# Altium PCB V.PcbDoc
Units mil, origin at the board's own origin, x right, y up, seen from the top; angles counter-clockwise.
Board outline 6000 x 4000 mil, 4 copper layers (Top Layer, Internal Plane 1, Internal Plane 2, Bottom Layer); 10 components, 11 nets, 83 pads, 42 vias.
Unrouted connection lines stored in the file: 8.
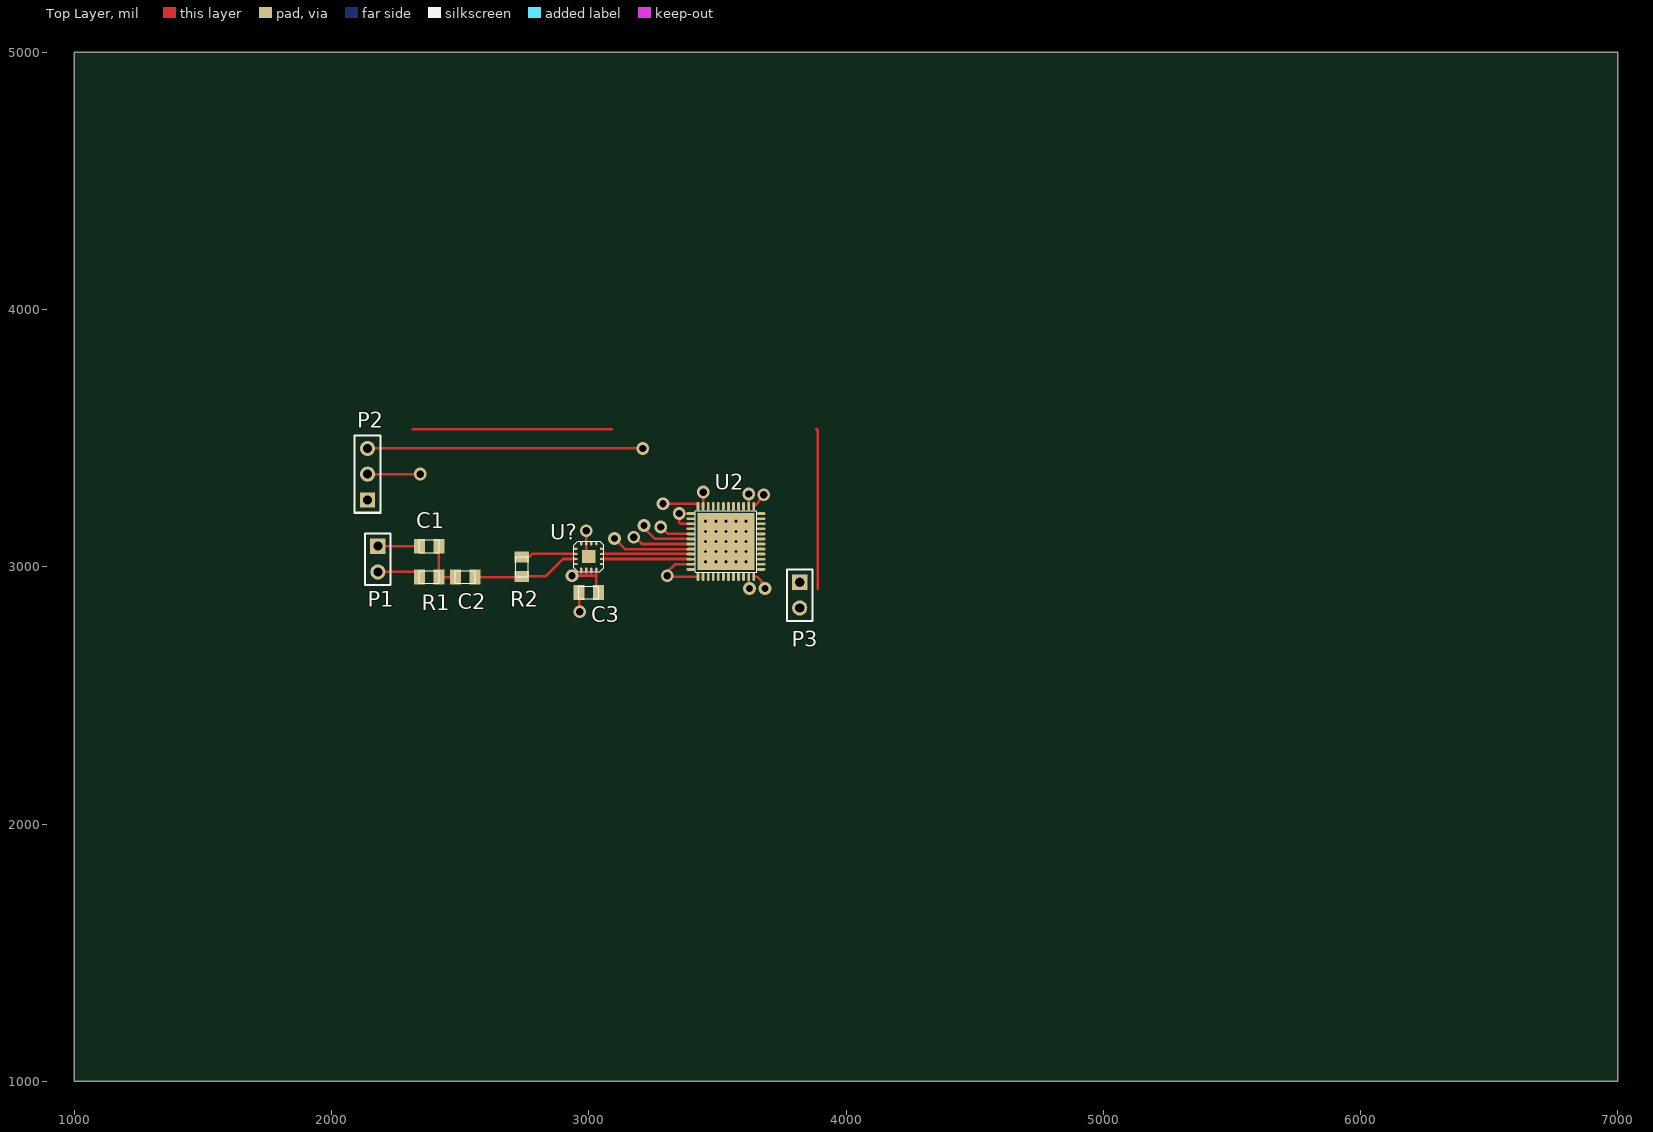
[diagram p0: Top Layer view]
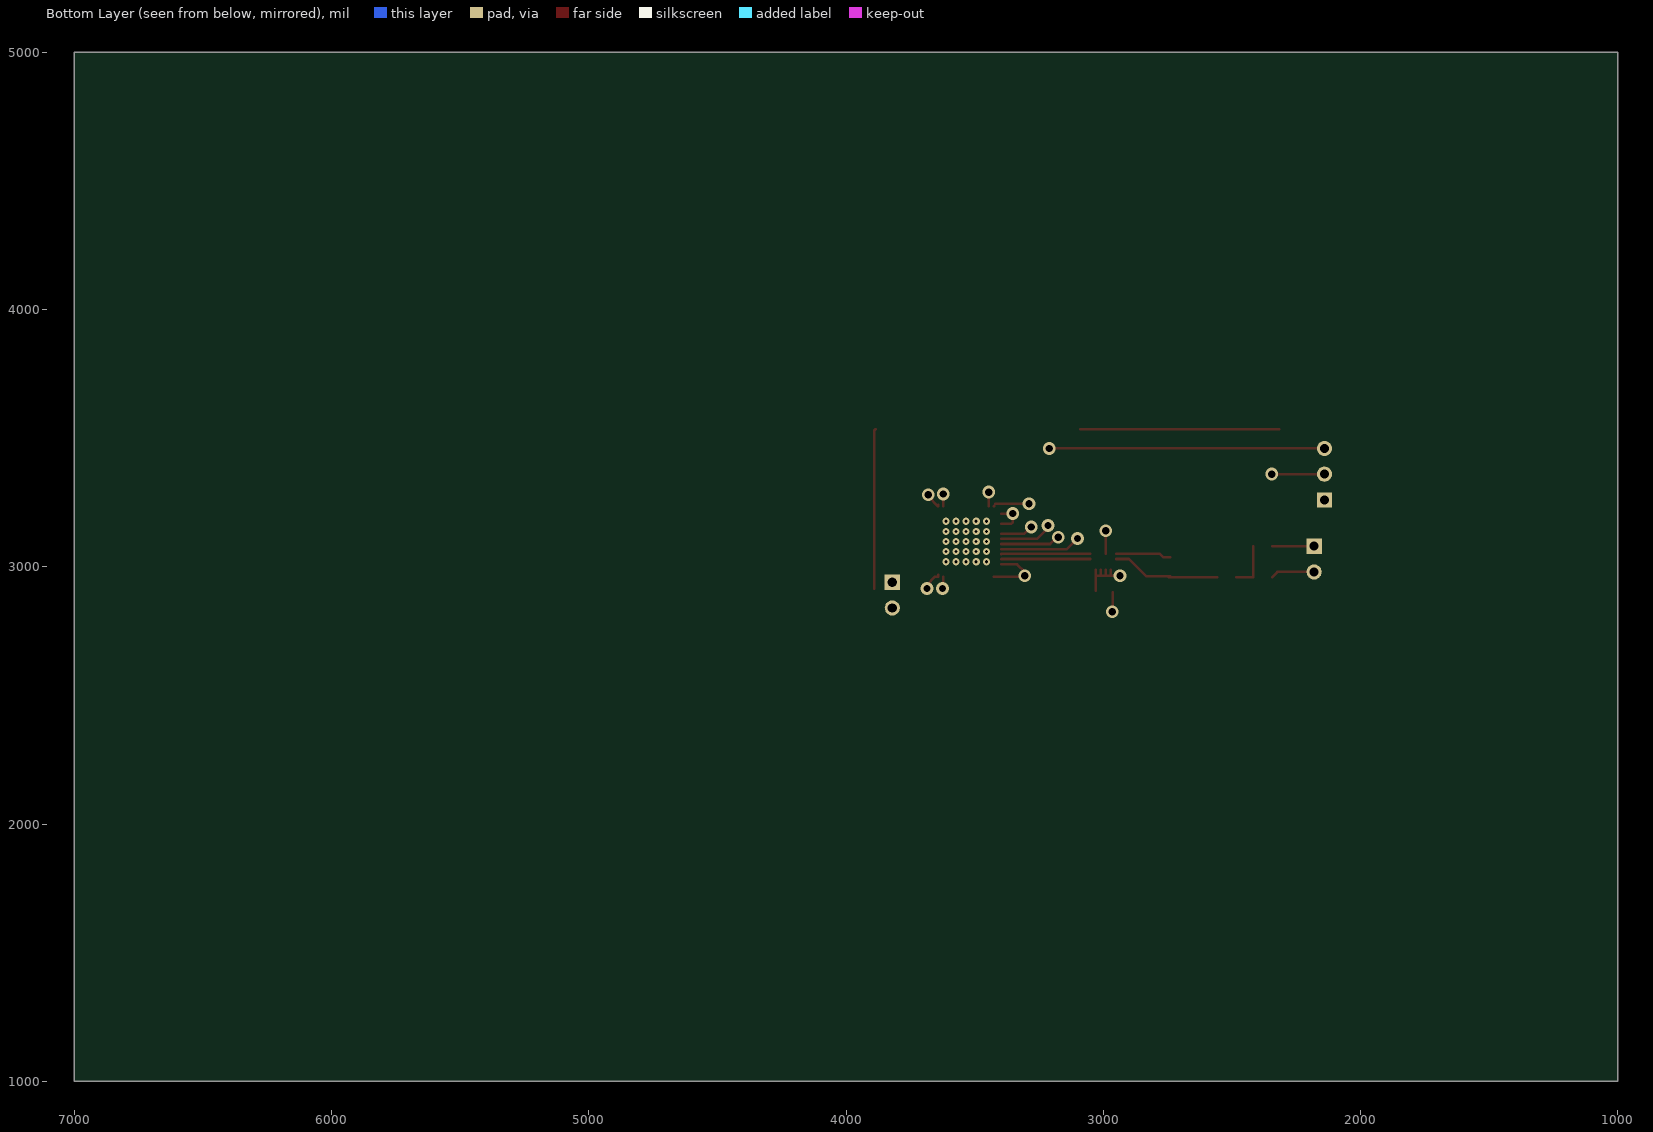
[diagram p1: Bottom Layer view, seen from below]
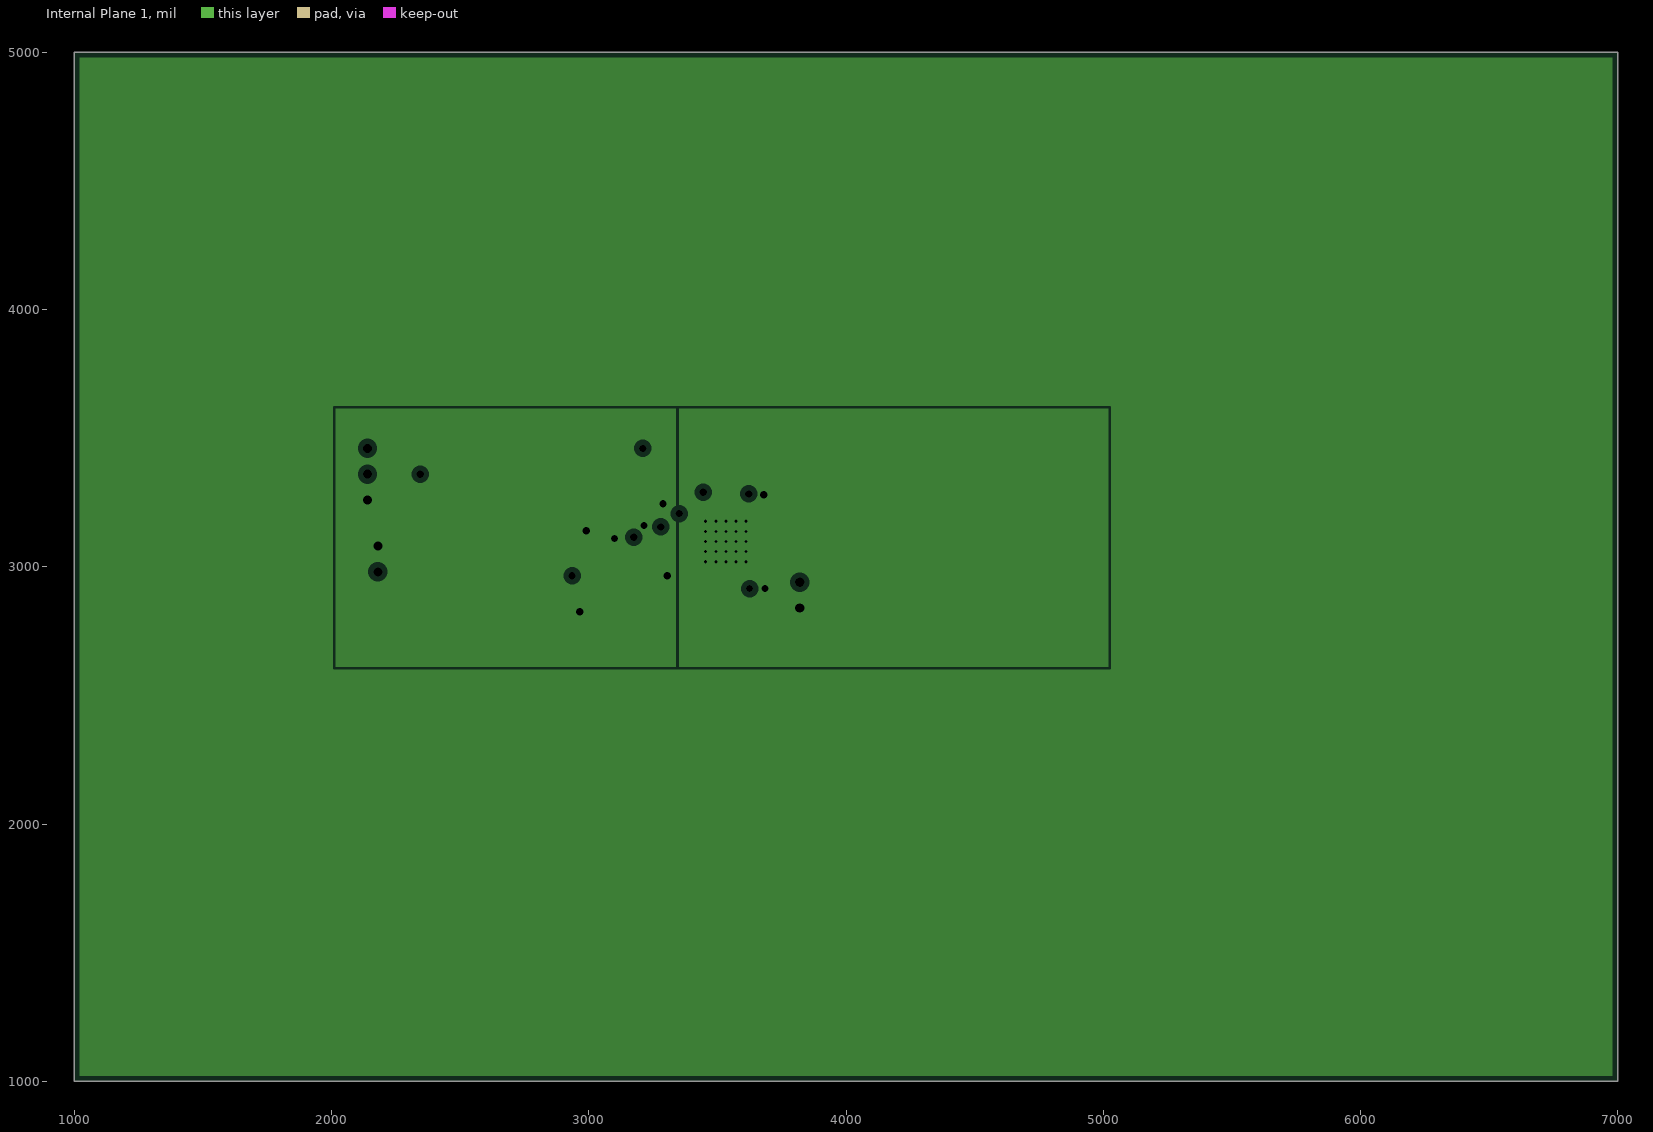
[diagram p2: Internal Plane 1, clearances drawn from the general rule]
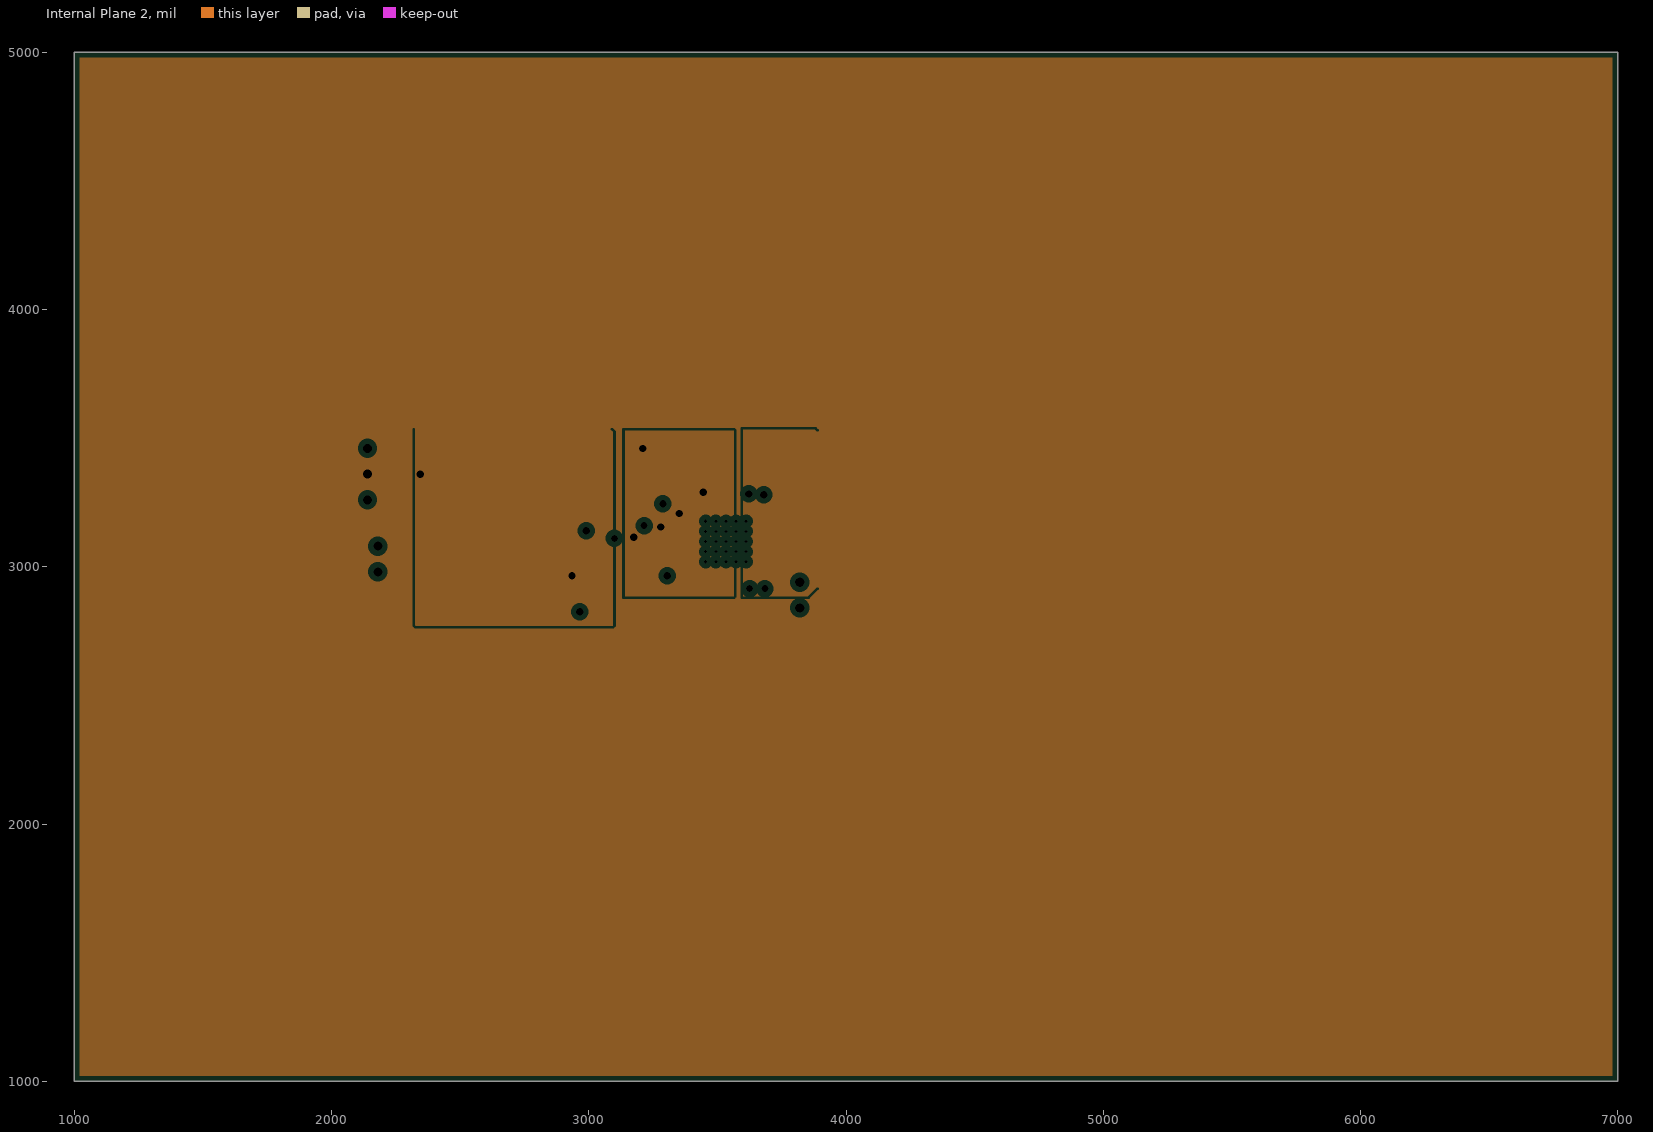
[diagram p3: Internal Plane 2, clearances drawn from the general rule]

## Layer stack, top to bottom
Top Layer: signal copper 1.4
Dielectric: core 12.6, FR-4, Dk 4.8
Internal Plane 1: plane copper 1.4, net (Multiple Nets)
Dielectric: prepreg 12.6, FR-4, Dk 4.8
Internal Plane 2: plane copper 1.4, net (Multiple Nets)
Dielectric: core 12.6, FR-4, Dk 4.8
Bottom Layer: signal copper 1.4

## Board outline
1000,1000 7000,1000 7000,5000 1000,5000

## Design rules (kind name [scope] priority, off if disabled: settings)
Clearance [All] p1: gap=0
MinimumSolderMaskSliver [All] p1 off: minsoldermaskwidth=10
PlaneClearance [All] p1: clearance=20
PlaneConnect [All] p1: planeconnectstyle=Relief reliefexpansion=20 reliefentries=4 reliefconductorwidth=10 reliefairgap=10
PolygonConnect [All] p1: connectstyle=Relief reliefconductorwidth=10 reliefentries=4 polygonreliefangle="90 Angle"
RoutingVias [All] p1 off: holewidth=28 width=50 viastyle="Through Hole" minholewidth=28 minwidth=25 maxholewidth=28 maxwidth=60
SilkscreenOverComponentPads [All] p1 off: minsilkscreentomaskgap=10
SolderMaskExpansion [All] p1: expansion=4
Width [All] p1: maxlimit=10 minlimit=10 preferedwidth=10
24 further rules are at their usual default settings.

## Components (designator, comment, footprint, x,y, rotation, side; value= is the part's Value field where it differs from the comment)
C1 "3.3pF" 0805 2380,3080 r180 top
C2 "3.3pF" 0805 2520,2960 r0 top
C3 "0.1uF" 0805 3000,2900 r180 top
P1 "Header 2" HDR1X2 2180,3080 r270 top
P2 "Header 3" HDR1X3 2140,3260 r90 top
P3 "Header 2" HDR1X2 3820,2940 r270 top
R1 "4.7k" 0805 2380,2960 r0 top
R2 "1.5k" 0805 2740,3000 r270 top
U2 "ADS61B49" QFN-48 3670,2990 r180 top
U? "ADA4932-1" LFCSP-16 3000,3040 r0 top

## Footprints (in the part's own frame and the unit in brackets; to place one, negate y for a bottom-side part, rotate by r counter-clockwise, add the part's x,y. Pads: shape width x height; smd on the part's side, far side on the other; paste and mask are expansions set on the pad)
0805 [mm]
  rect 1.1x1.45 smd: 1(-0.95,0) 2(0.95,0)
  silkscreen extent -1,-0.62 1,0.63, body extent -1,-0.62 1,0.62, height 0.5
HDR1X2 [mm] "Connector; Header; 2 Position"
  rect 1.5x1.5 hole 0.9: 1(0,0)
  round 1.5 hole 0.9: 2(2.54,0)
  silkscreen extent -1.27,-1.27 3.81,1.27
HDR1X3 [mm] "Connector; Header; 3 Position"
  rect 1.5x1.5 hole 0.9: 1(0,0)
  round 1.5 hole 0.9: 2(2.54,0) 3(5.08,0)
  silkscreen extent -1.27,-1.27 6.35,1.27
LFCSP-16 [mm] "ADA4932-1,"
  oval 0.4x0.23 smd mask+0.07: 1(-1.3,0.75) 2(-1.3,0.25) 3(-1.3,-0.25) 4(-1.3,-0.75) 9(1.3,-0.75) 10(1.3,-0.25) 11(1.3,0.25) 12(1.3,0.75)
  oval 0.23x0.4 smd mask+0.07: 5(-0.75,-1.3) 6(-0.25,-1.3) 7(0.25,-1.3) 8(0.75,-1.3) 13(0.75,1.3) 14(0.25,1.3) 15(-0.25,1.3) 16(-0.75,1.3)
  rect 1.3x1.3 smd: 17(0,0)
  silkscreen extent -1.5,-1.5 1.5,1.5
QFN-48 [mm] "ADS61B49"
  rect 5.6x5.6 smd: 0(3.475,-2.75)
  oval 0.28x0.85 smd mask+0.07: 1(0.725,0.725) 2(1.225,0.725) 3(1.725,0.725) 4(2.225,0.725) 5(2.725,0.725) 6(3.225,0.725) 7(3.725,0.725) 8(4.225,0.725) 9(4.725,0.725) 10(5.225,0.725) 11(5.725,0.725) 12(6.225,0.725) 25(6.225,-6.225) 26(5.725,-6.225) 27(5.225,-6.225) 28(4.725,-6.225) 29(4.225,-6.225) 30(3.725,-6.225) 31(3.225,-6.225) 32(2.725,-6.225) 33(2.225,-6.225) 34(1.725,-6.225) 35(1.225,-6.225) 36(0.725,-6.225)
  oval 0.85x0.28 smd mask+0.07: 13(6.95,0) 14(6.95,-0.5) 15(6.95,-1) 16(6.95,-1.5) 17(6.95,-2) 18(6.95,-2.5) 19(6.95,-3) 20(6.95,-3.5) 21(6.95,-4) 22(6.95,-4.5) 23(6.95,-5) 24(6.95,-5.5) 37(0,-5.5) 38(0,-5) 39(0,-4.5) 40(0,-4) 41(0,-3.5) 42(0,-3) 43(0,-2.5) 44(0,-2) 45(0,-1.5) 46(0,-1) 47(0,-0.5) 48(0,0)
  silkscreen extent 0.43,-5.8 6.53,0.3

## Part data
C1 C2 C3: library part Capacitor
P1 P3: "Header, 2-Pin"
P2: "Header, 3-Pin"
R1 R2: library part Resistor

## Via types
v1: diameter 27.56, hole 11.81, Top Layer to Bottom Layer, 25 vias
v2: diameter 50, hole 28, Top Layer to Bottom Layer, 17 vias

## Nets (pads, with @x,y where several pads share a name; then routed paths per layer and width w, separated by ;. In a path a pad name is that pad's centre, name@x,y a point inside that pad or via, vN(x,y) a via of type N, cw(c..) or ccw(c..) an arc to the next point about the centre after c; other vN are vias at no path point)
+1.8V: P3.1 U2.2 U2.35 | length 101.1
  Top Layer w0: U2.2@3621.77,2948.23 U2.2
  Top Layer w10: v2@3621.77,2921.77 U2.2 ; U2.35 v2(3621.77,3283.23)
  other v2: 3625,2915
+3.3V: P2.3 U2.8 U2.18 U2.20 U2.22 U2.24 U2.26 | length 1591.7
  Top Layer w10: P2.3@2145,3455 P2.3 v2@3200,3460 ; v2@3185,3110 3206.57,3088.43 U2.18 ; v2@3290,3145 3307.2,3127.8 U2.20 ; U2.22 3357.17,3167.17 3351.54,3172.8 v2(3351.54,3206.54) U2.24 ; U2.26 3444.61,3274.61 3445,3275 v2@3445,3300
  other v2: 3175,3115 3280,3155 3445,3290 3210,3460
+5V: C3.1 P2.2 U?.5 U?.6 U?.7 U?.8 | length 461.1
  Top Layer w10: P2.2 v2@2355,3360 ; v2(2935,2965) 2970,2965 ; U?.5@2970,2988.35 2970,2965 ; 2990.16,2965.16 U?.6 ; 3009.84,2965.16 U?.7 ; C3.1@3029.53,2907.87 3029.53,2965 ; U?.8 3029.53,2965 ; 2970,2965 3029.53,2965
  other v2: 2345,3360
DRGND: P3.2 U2.1 U2.36 | length 145.2
  Top Layer w10: U2.1@3641.46,2967.86 U2.1 3653.54,2961.46 3685,2930 v2(3685,2915) ; U2.36@3641.46,3241.46 U2.36 3680,3273.62 v2(3680,3280)
  other v1: 3454.45,3019.53 3493.82,3019.53 3533.19,3019.53 3572.56,3019.53 3611.93,3019.53 3454.45,3058.9 3493.82,3058.9 3533.19,3058.9 3572.56,3058.9 3611.93,3058.9 3454.45,3098.27 3493.82,3098.27 3533.19,3098.27 3572.56,3098.27 3611.93,3098.27 3454.45,3137.64 3493.82,3137.64 3533.19,3137.64 3572.56,3137.64 3611.93,3137.64 3454.45,3177.01 3493.82,3177.01 3533.19,3177.01 3572.56,3177.01 3611.93,3177.01
GND: C1.2 C3.2 P1.1 P2.1 U2.0 U2.9 U2.12 U2.14 U2.17 U2.19 U2.25 U?.13 U?.14 U?.15 U?.16 U?.17 | length 1205
  Top Layer w10: P1.1 C1.2 ; v2@2962.6,2832.6 C3.2 ; U?.17@2990.16,3049.84 U?.15 v2(2990.16,3139.84) ; v2(3100,3110) 3141.26,3068.74 U2.17 ; v2@3210,3155 3256.89,3108.11 U2.19 ; v2(3288.07,3245) U2.25@3420,3245 ; v2(3305,2965) 3305,2979.37 3335.32,3009.68 U2.14 ; v2@3311.46,2961.46 U2.12 ; U2.25@3423.46,3236.54 U2.25
  other v2: 2965,2825 3215,3160
NetC1_1: C1.1 C2.1 R1.2 | length 185.2
  Top Layer w10: C1.1 R1.2 C2.1
NetC2_2: C2.2 R2.2 U?.3 | length 424.4
  Top Layer w10: C2.2 R2.2@2745,2960 ; R2.2 2832.6,2962.6 2900.16,3030.16 U?.3
NetP1_2: P1.2 R1.1 | length 170.9
  Top Layer w10: P1.2 2322.6,2980 R1.1
NetR2_1: R2.1 U?.2 | length 213.9
  Top Layer w10: R2.1 2767.4,3037.4 2780,3050 U?.2@2948.66,3050
NetU2_15: U2.15 U?.10 | length 345.5
  Top Layer w10: U?.10 3395.59,3030.16 U2.15
NetU2_16: U2.16 U?.11 | length 345.5
  Top Layer w10: U?.11 3395.59,3049.84 U2.16
pads on no net: U2.3 U2.4 U2.5 U2.6 U2.7 U2.10 U2.11 U2.13 U2.21 U2.23 U2.27 U2.28 U2.29 U2.30 U2.31 U2.32 U2.33 U2.34 U2.37 U2.38 U2.39 U2.40 U2.41 U2.42 U2.43 U2.44 U2.45 U2.46 U2.47 U2.48 U?.1 U?.4 U?.9 U?.12
copper on no net: | length 1397.1
  Top Layer w10: 2315,3535 3090,3535 ; 3885,3535 3890,3530 3890,2915

## Polygon pours and split planes (outlines as drawn)
GND on Internal Plane 1 (split plane): 6979.9,1020.1 1020.1,1020.1 1020.1,4979.9 6979.9,4979.9
DRGND on Internal Plane 1 (split plane): 5019.9,2610.1 3350.1,2610.1 3350.1,3614.9 5019.9,3614.9
GND on Internal Plane 1 (split plane): 3339.9,2610.1 2015.1,2610.1 2015.1,3614.9 3339.9,3614.9
+5V on Internal Plane 2 (split plane): 6979.9,1020.1 1020.1,1020.1 1020.1,4979.9 6979.9,4979.9
+3.3V on Internal Plane 2 (split plane): 3564.9,3527.89 3564.9,2887.11 3562.89,2885.1 3140.1,2885.1 3140.1,3529.9 3562.89,3529.9

## Other copper
Internal Plane 1 (plane layer: these items are gaps in the copper):
  lines w10: 3345,2605 3345,3620 ; 2010,2605 3840,2605 5025,2605 5025,3620 3835,3620 2010,3620 2010,2605
Internal Plane 2 (plane layer: these items are gaps in the copper):
  lines w10: 2320,3535 2320,2770 2325,2765 2410,2765 2580,2765 2665,2765 3095,2765 ; 3090,3535 3100,3525 3100,2770 ; 3890,2915 3855,2880 3595,2880 3595,3538.05 3881.95,3538.05 3890,3530 ; 3095,2765 3100,2770 ; 3095,2765 3100,2770 ; 3135,2880 3565,2880 3570,2885 3570,3530 3565,3535 3135,3535 3135,2880